# Altium PCB PCB1.PcbDoc (part 1 of 2)
Units mm, origin at the board's own origin, x right, y up, seen from the top; angles counter-clockwise.
Board outline 100 x 100 mm, 4 copper layers (Top Layer, GND, POWER, Bottom Layer), stack 1.439 mm thick; 27 components, 14 nets, 65 pads, 66 vias.
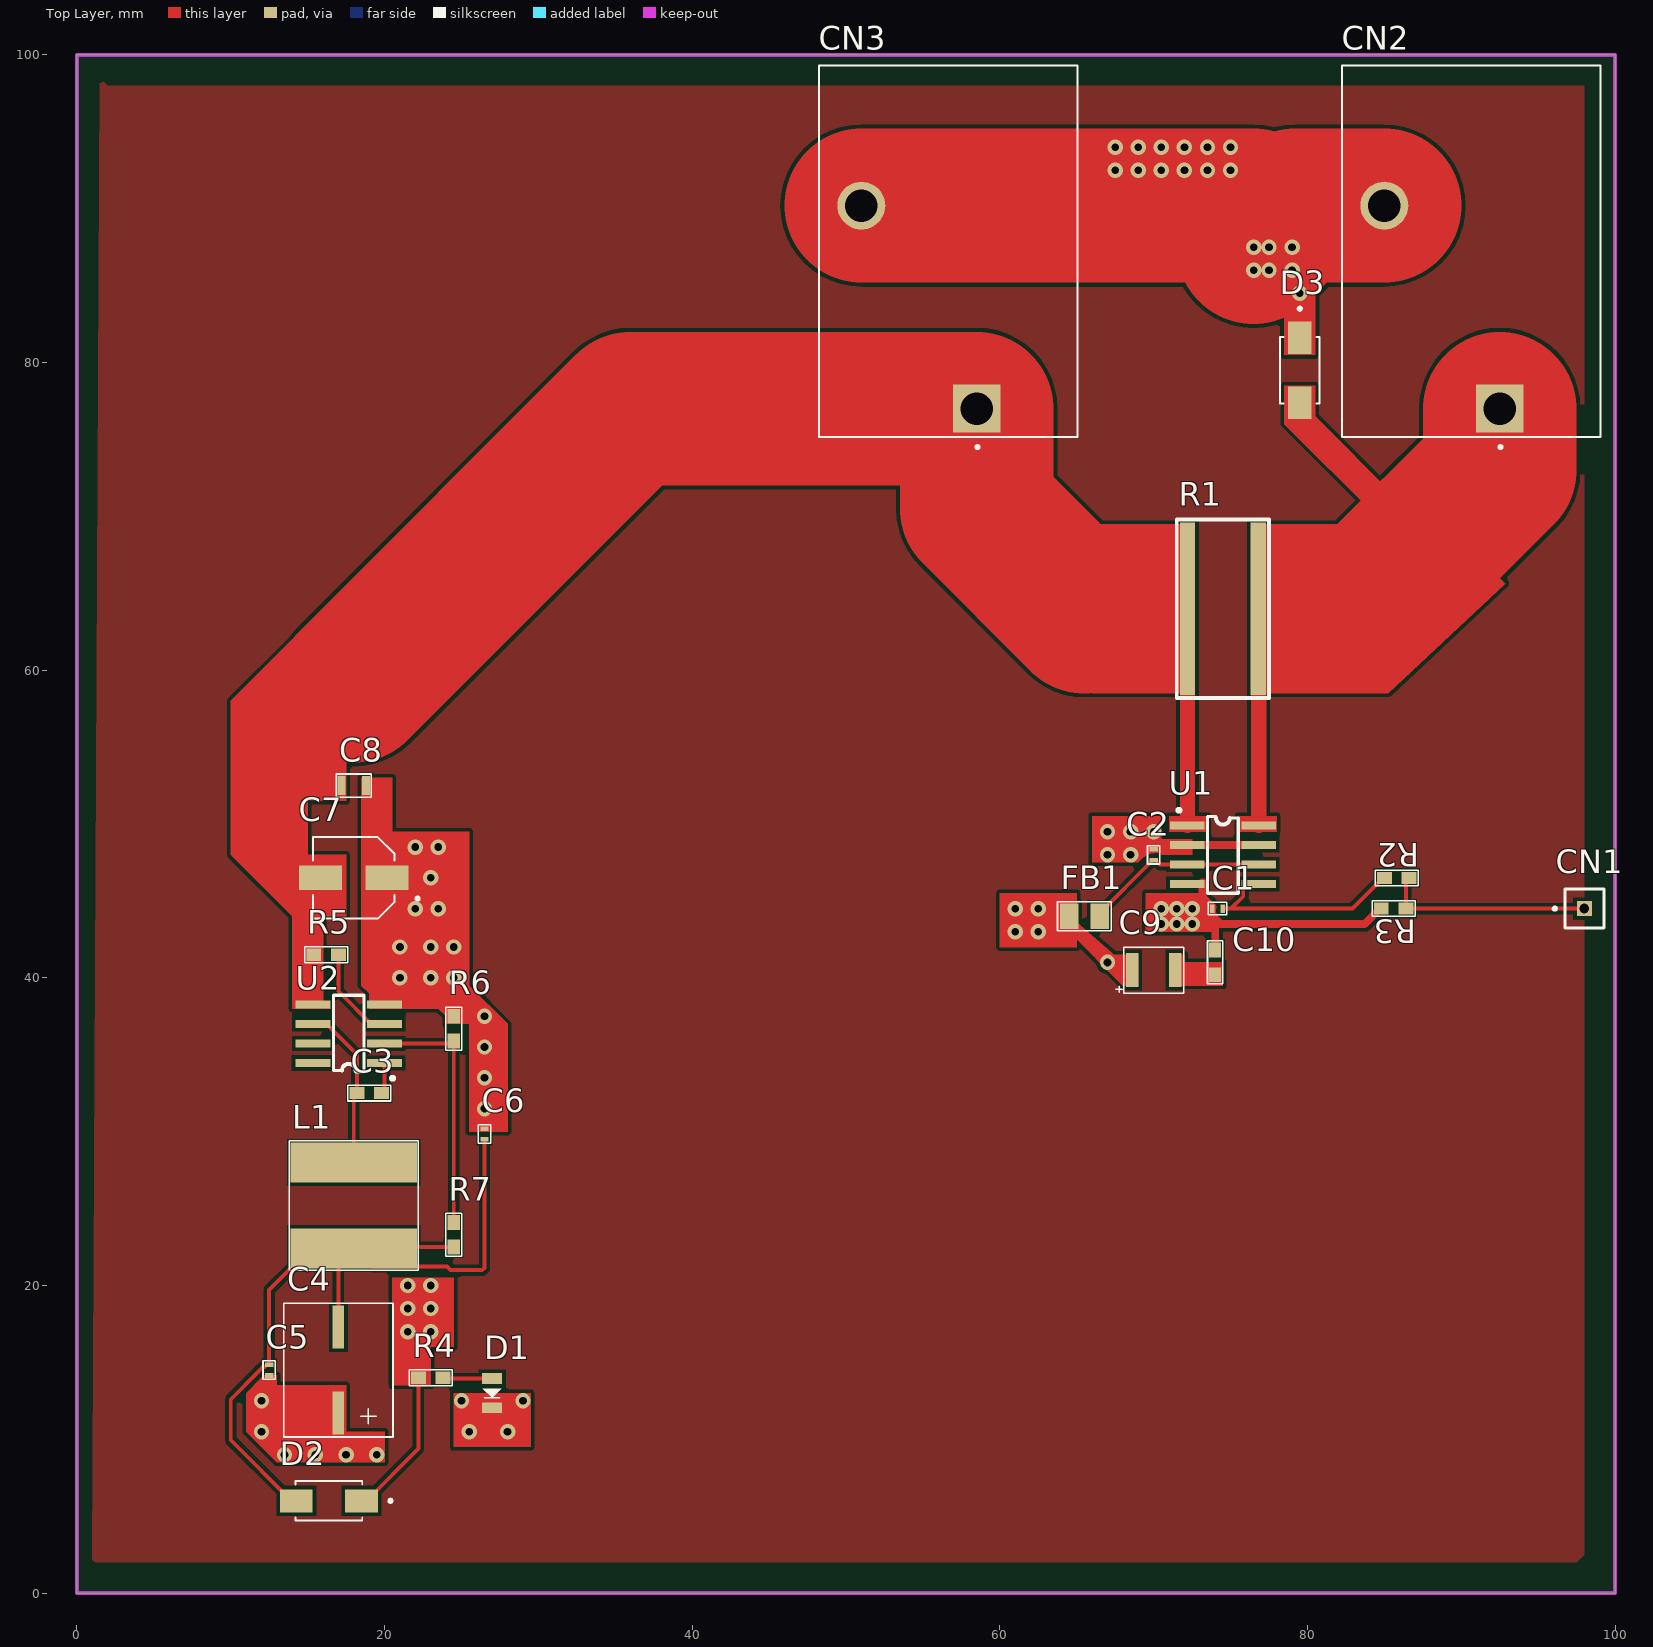
[diagram p0: Top Layer view]
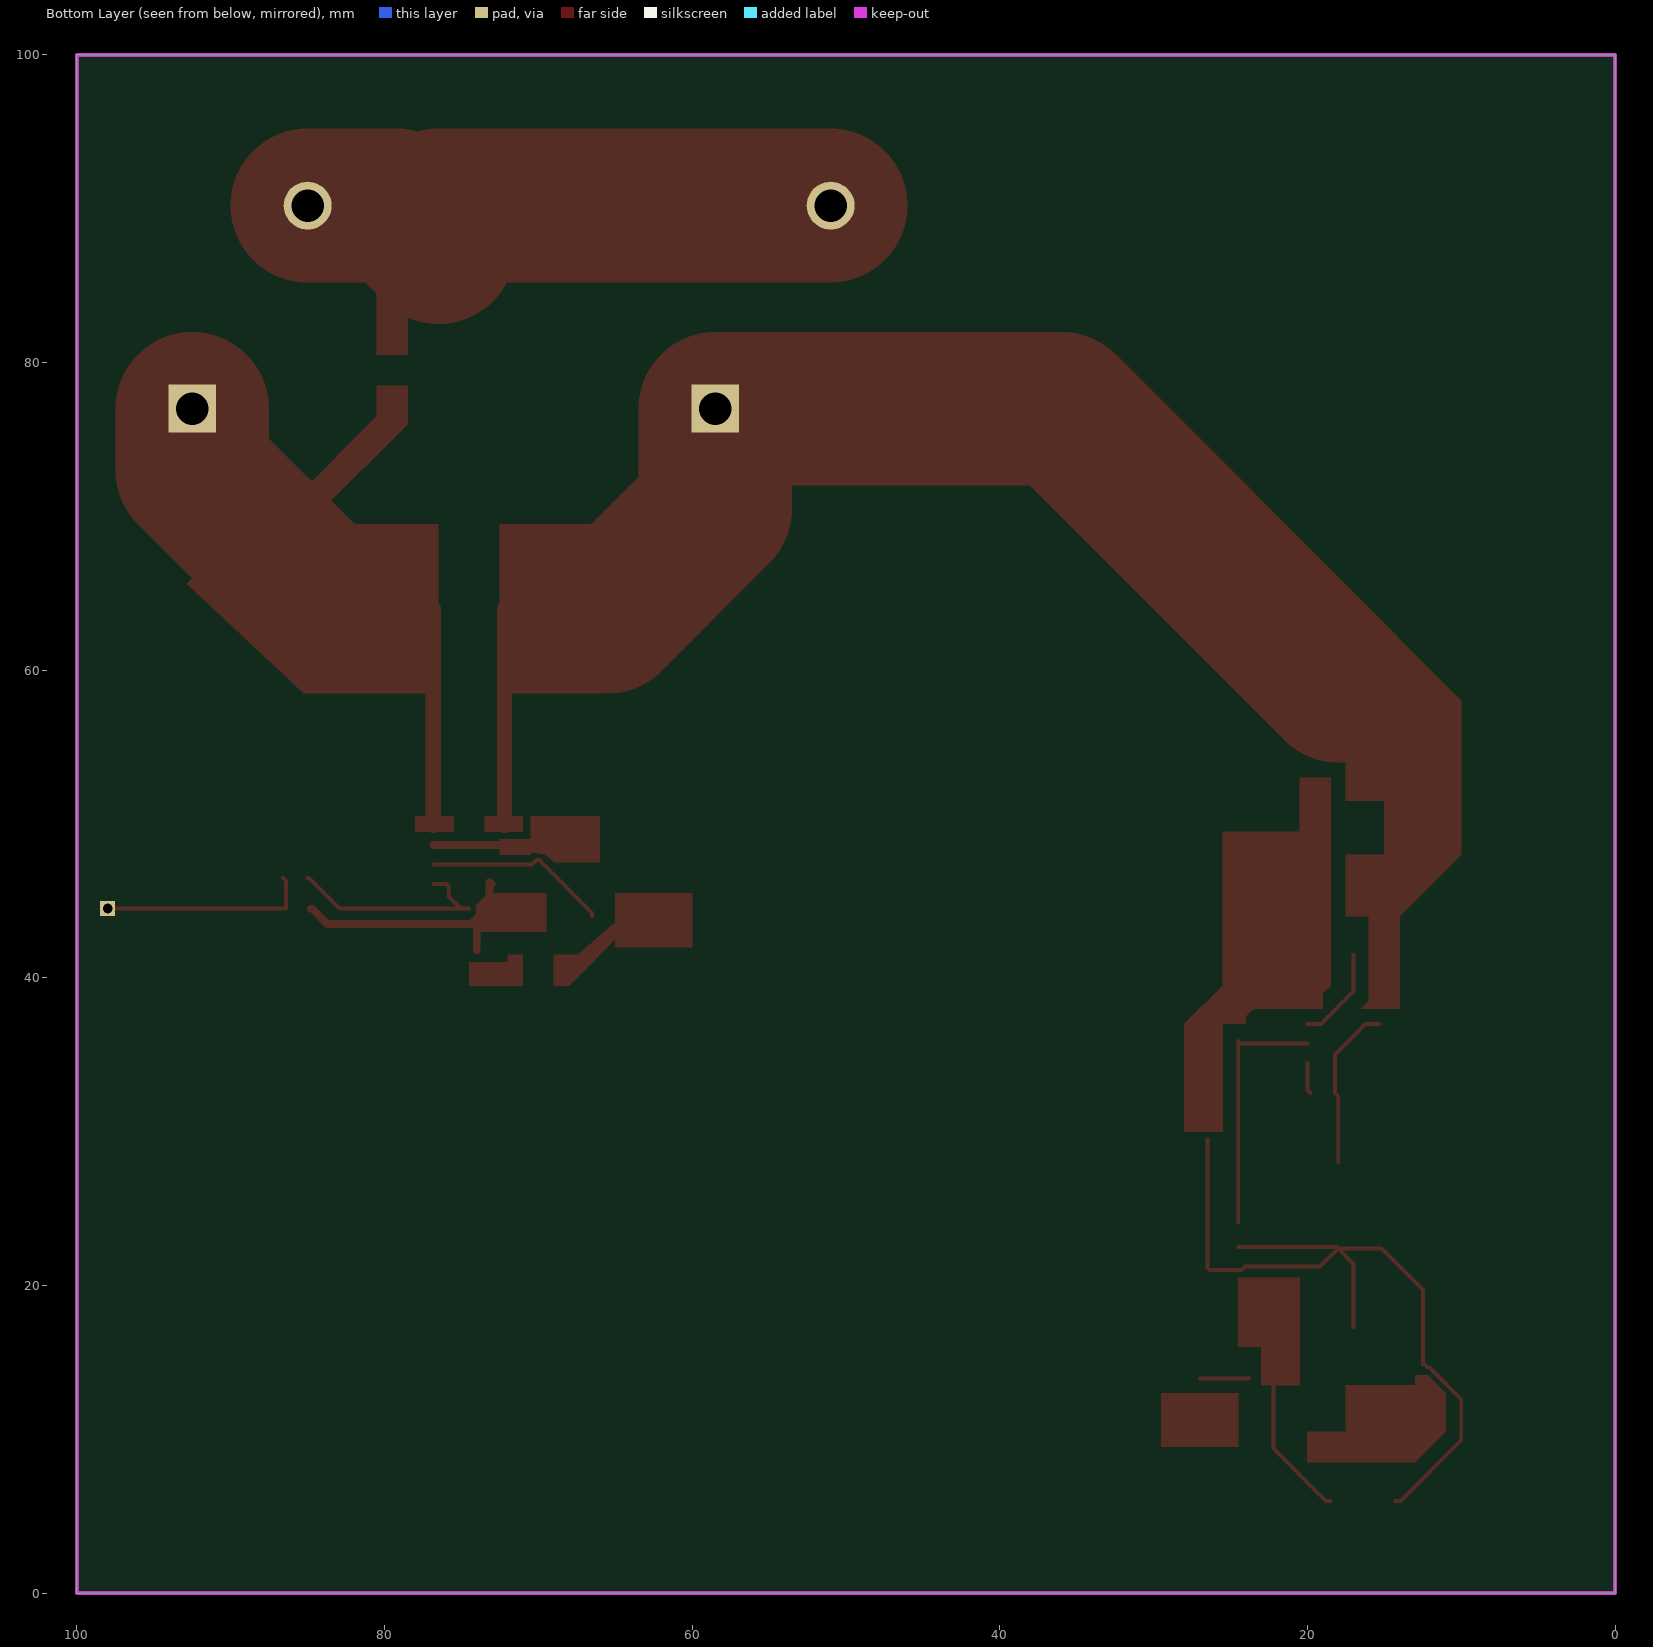
[diagram p1: Bottom Layer view, seen from below]
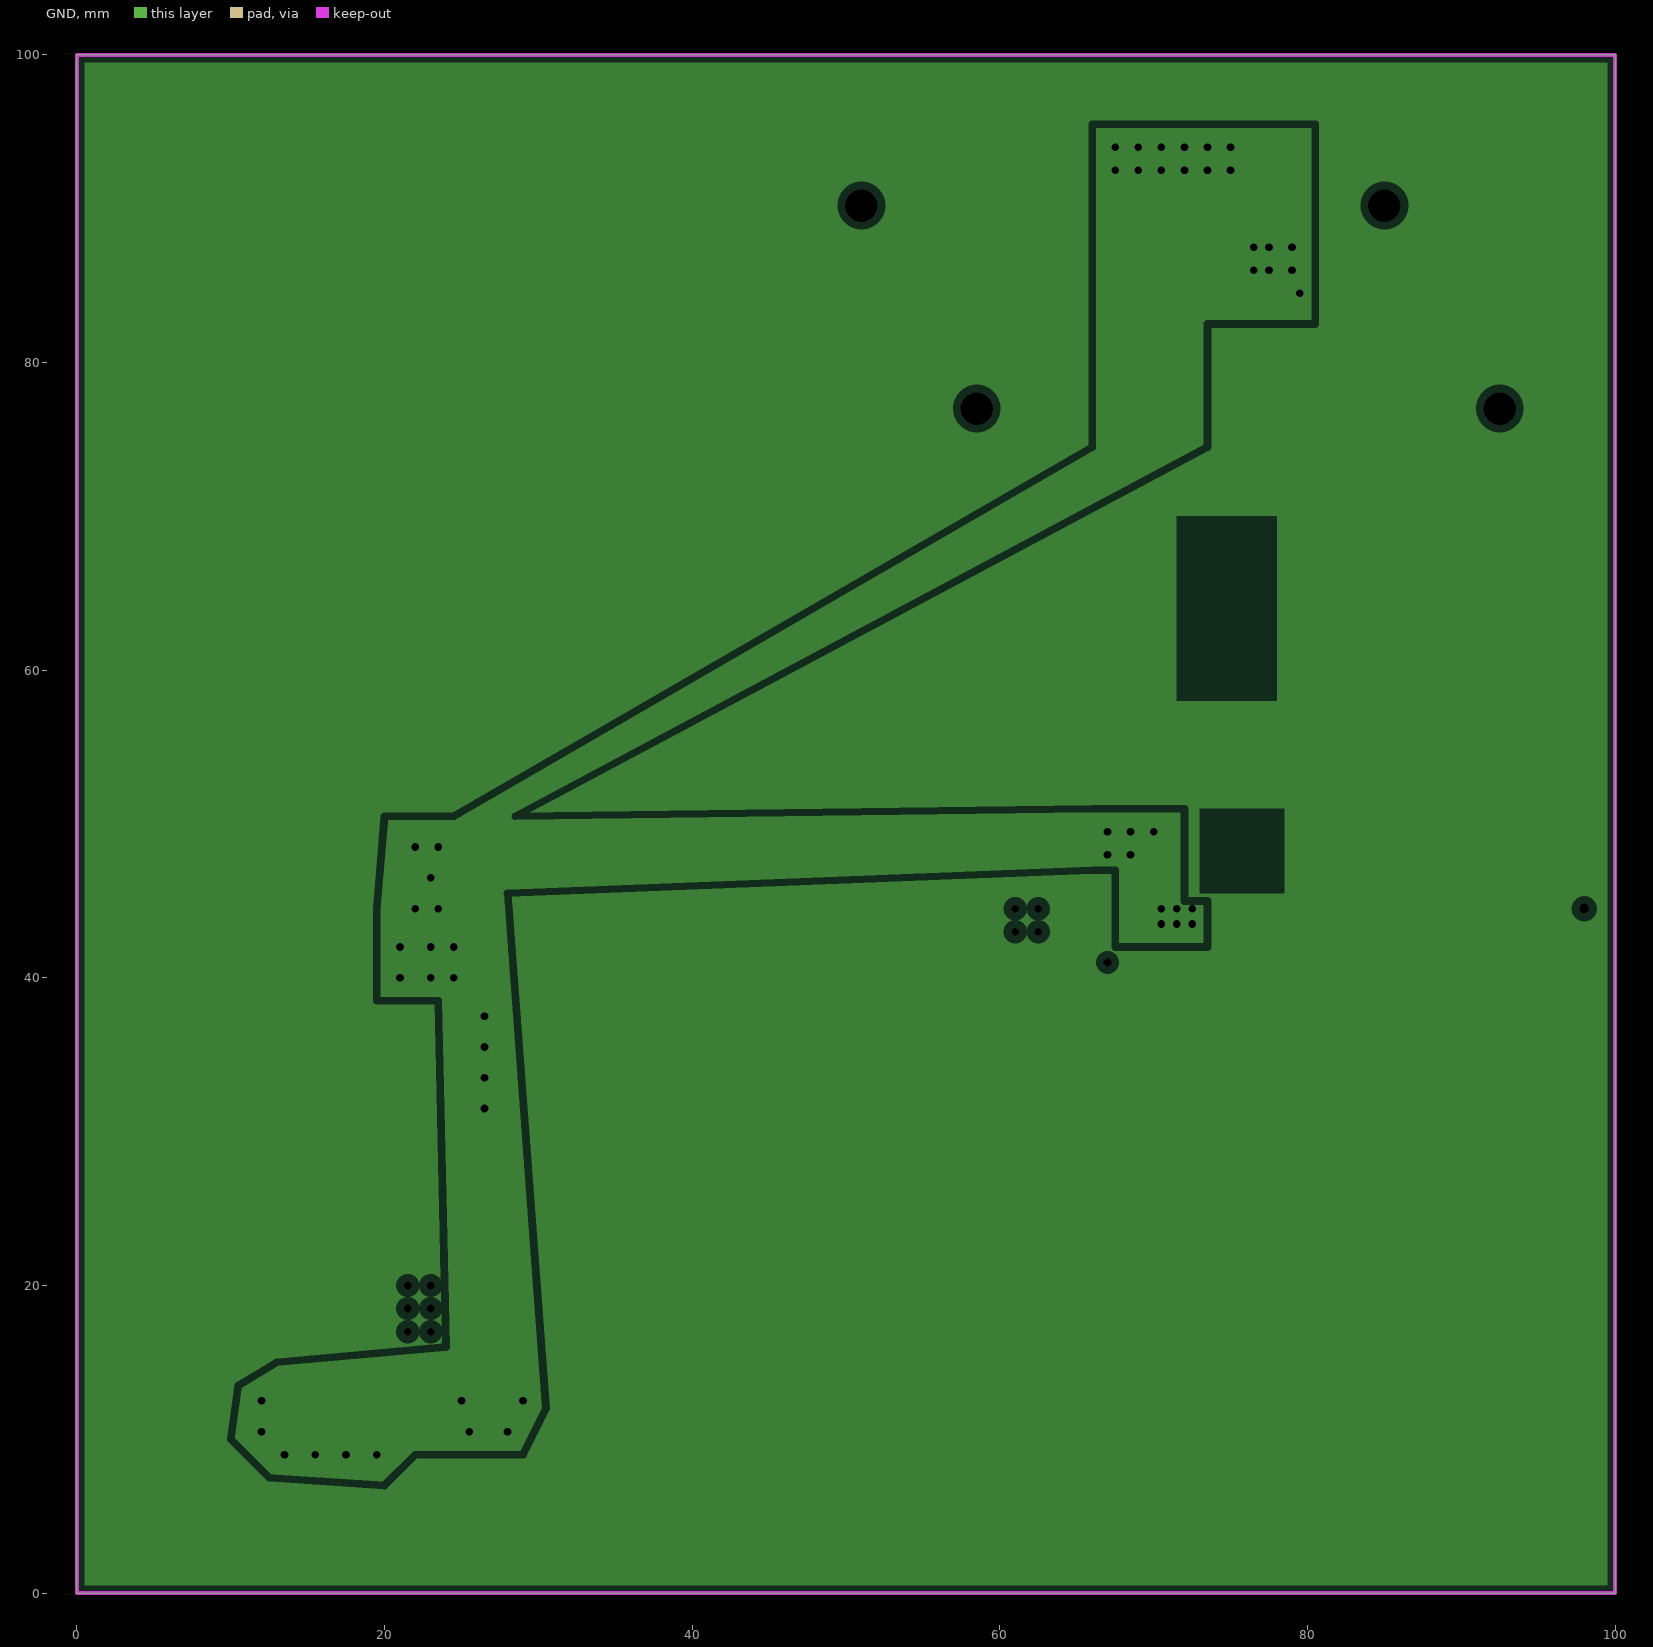
[diagram p2: GND, clearances drawn from the general rule]
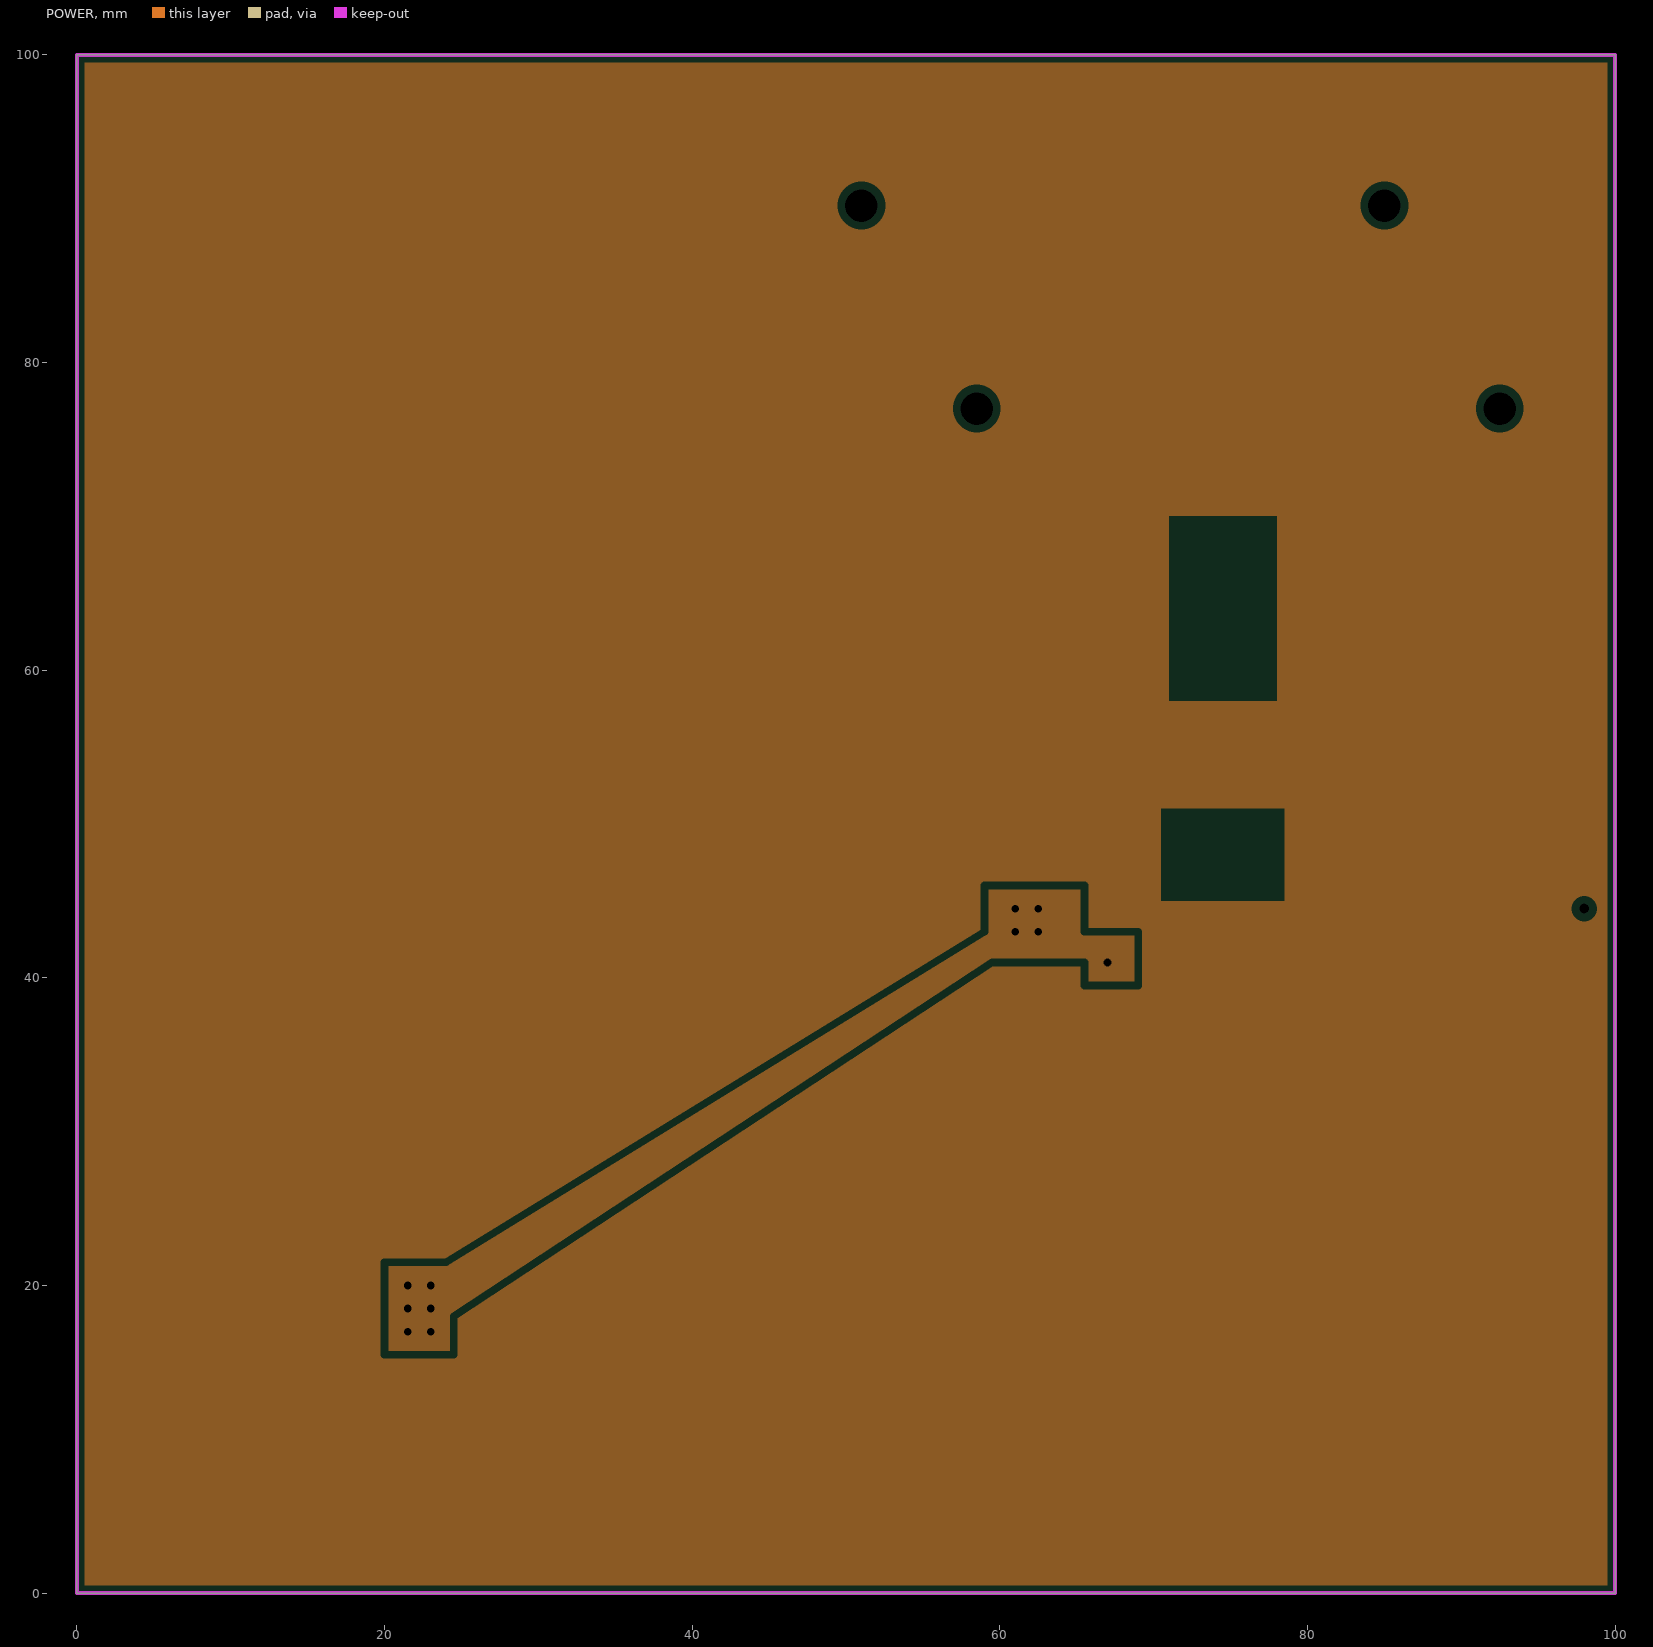
[diagram p3: POWER, clearances drawn from the general rule]
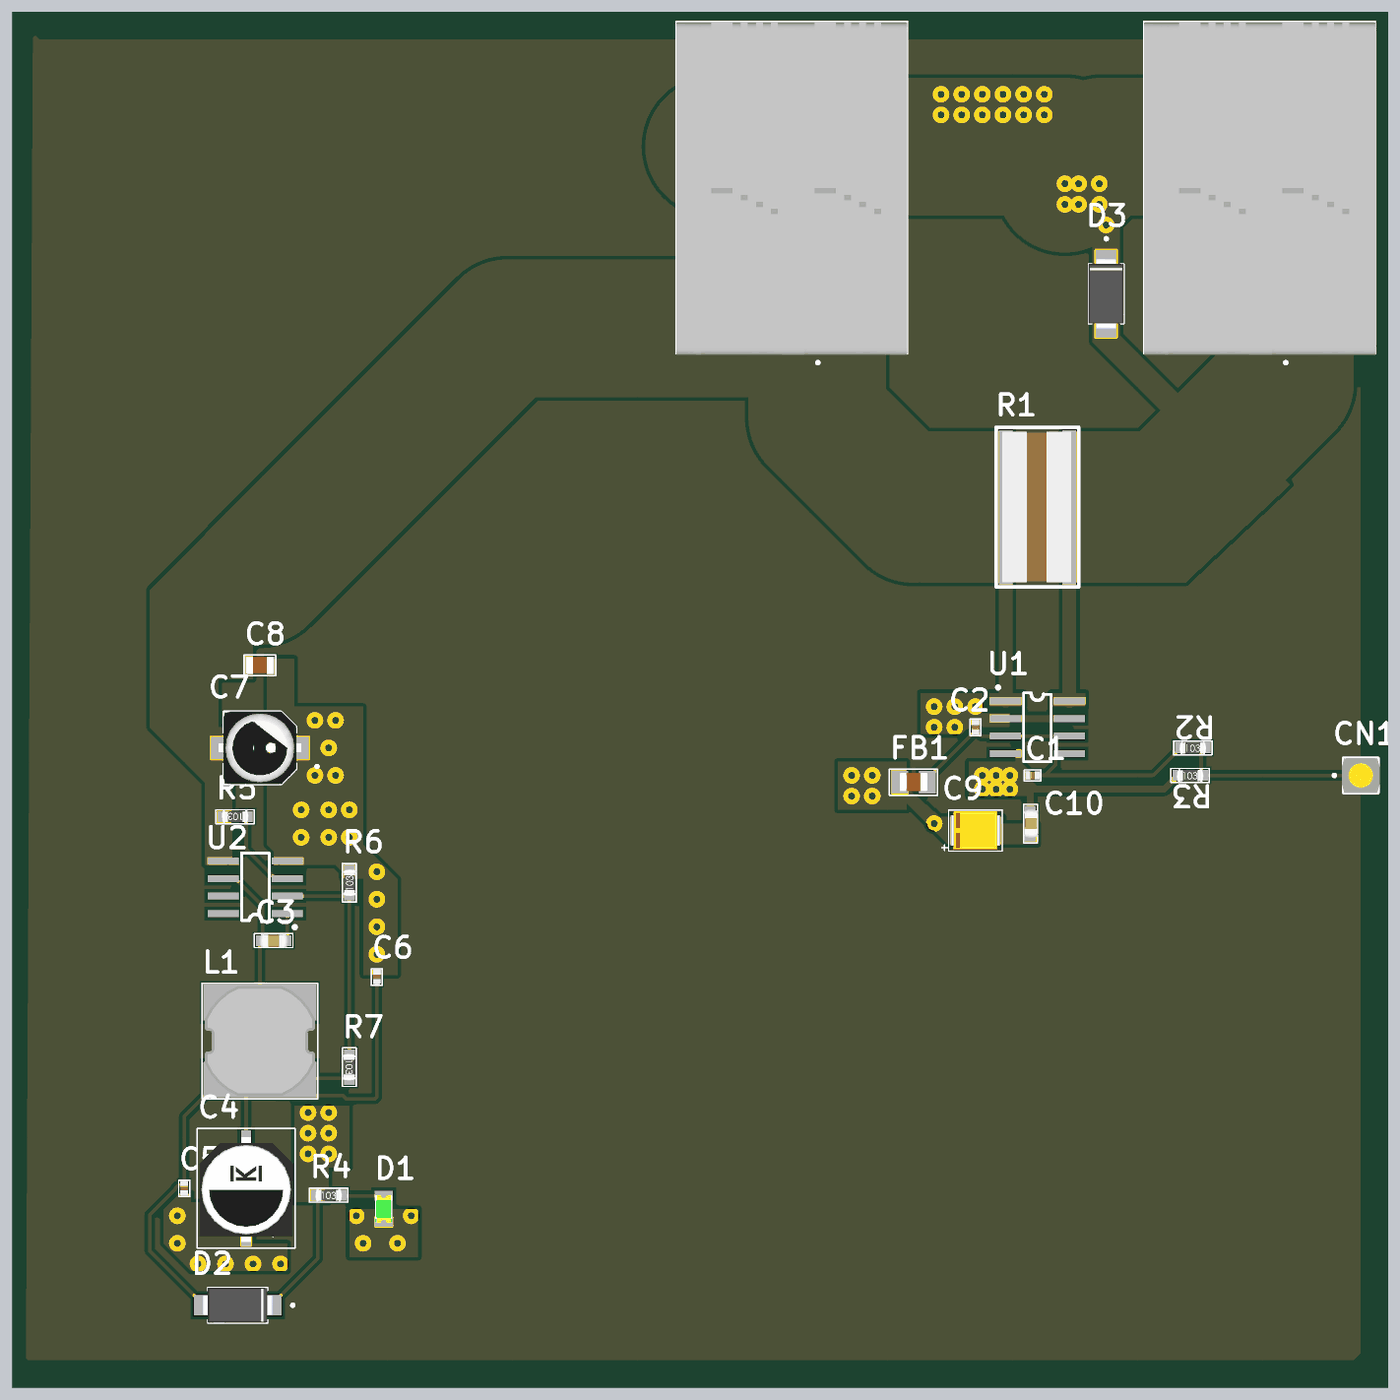
[diagram p4: 3D render of the assembled board from above, using the file's embedded part models]

## Layer stack, top to bottom
Top Solder: solder mask 0.0254, SM-001, Dk 4
Top Layer: signal copper 0.07
Dielectric 1: prepreg 0.1295, PP-017, Dk 4.3
Dielectric 2: prepreg 0.1295, PP-017, Dk 4.3
GND: plane copper 0.035
Dielectric 3: core 0.7112, Core-039, Dk 4.8
POWER: plane copper 0.035
Dielectric 4: prepreg 0.1295, PP-017, Dk 4.3
Dielectric 5: prepreg 0.1295, PP-017, Dk 4.3
Bottom Layer: signal copper 0.07
Bottom Solder: solder mask 0.0254, SM-001, Dk 4

## Board outline
0,0 100,0 100,100 0,100

## Design rules (kind name [scope] priority, off if disabled: settings)
Clearance [All] p1: gap=0.254 ignorepadtopadclearanceinfootprint=FALSE
PlaneClearance [All] p1: clearance=0.508
PlaneConnect [All] p1: planeconnectstyle=Relief reliefexpansion=0.508 reliefentries=4 reliefconductorwidth=0.254 reliefairgap=0.254
PolygonConnect [All] p1: connectstyle=Relief reliefconductorwidth=0.254 reliefentries=4 polygonreliefangle="90 Angle" airgapwidth=0.254
RoutingVias [All] p1: holewidth=0.711 width=1.27 viastyle="Through Hole" minholewidth=0.711 minwidth=1.27 maxholewidth=0.711 maxwidth=1.27
SolderMaskExpansion [All] p1: expansion=0.102 istentingtop=FALSE
SupplyNets "Schematic Supply Nets_1" [InNet('36VDC')] p1: voltage=0.000
SupplyNets "Schematic Supply Nets" [InNet('GND')] p2: voltage=0.000
Width [All] p1: maxlimit=16 minlimit=0.254 preferedwidth=0.254 minimp=50.000000 maximp=50.000000 favimp=50.000000
28 further rules are at their usual default settings.

## Classes and differential pairs
component class "Akım Algılama": C1 C2 CN1 CN2 CN3 D3 R1 R2 R3 U1
component class "5V Converter": C3 C4 C5 C6 C7 C8 C9 C10 D1 D2 FB1 L1 R4 R5 R6 R7 U2

## Components (designator, comment, footprint, x,y, rotation, side; value= is the part's Value field where it differs from the comment)
C1 "CC0402KPX7R9BB104" CAP_1005 74.15,44.5 r0 top
C2 "CC0402KPX7R9BB104" CAP_1005 70,48 r90 top
C3 "C0603C103F3GECAUTO" CAP_0603 19,32.5 r0 top
C4 "EEV226M025S9DAA" "EEV Series" 17,14.5 r90 top
C5 "CL05B104KA5NNNC" CAP_1005 12.5,14.5 r270 top value=0.1uF
C6 "CL05B104KA5NNNC" CAP_1005 26.5,29.85 r90 top value=0.1uF
C7 "EEE-FK1H100UR" CAP_RADIAL_EEE-FK1H100UR 18,46.5 r180 top value=10uF
C8 "KGM21NR71H104KT" CAP_2012 18,52.5 r0 top value=0.1UF
C9 "T494B106K016AT" "CAP_TANTAL_1411 [3528 Metric]" 70,40.5 r0 top value=10uF
C10 "C0603C104K5RACTU" CAP_0603 74,41 r90 top
CN1 "TS-101-T-A" TS-101-T-A 98,44.5 r0 top
CN2 "1719192" 1719192 99.3,99.55 r180 top
CN3 "1719192" 1719192 65.3,99.55 r180 top
D1 "LTST-C171GKT" LED_GREEN_0805 27,13 r90 top
D2 "SS14" "SMA-2 (SS14)" 16.385,6 r180 top
D3 "SS14" "SMA-2 (SS14)" 79.5,79.5 r270 top
FB1 "BLM21PG221SN1D" CAP_0805 65.5,44 r0 top
L1 "SRN8040-101M" SRN8040-101M 18,25.2 r270 top
R1 "FCSL110R005FER" FCSL110 74.5,64 r0 top value=5mR
R2 "RC0201FR-0710KL" RES_0603 85.8,46.5 r0 top value=100kR
R3 "RC0603FR-106K8L" RES_0603 85.6,44.5 r0 top value=6.8kR
R4 "CRG0603F330R" RES_0603 23,14 r0 top value=330R
R5 "ERJ-3EKF3303V" RES_0603 16.2,41.5 r180 top value=330kR
R6 "RC0603FR-071K2L" RES_0603 24.5,36.7 r90 top value=1.2kR
R7 "RC0603FR-106K8L" RES_0603 24.5,23.3 r270 top value=6.8kR
U1 "INA240A2DR" SOIC8 74.5,48 r270 top
U2 "LM5017MR/NOPB" SOIC8 17.675,36.365 r90 top

## Footprints (in the part's own frame and the unit in brackets; to place one, negate y for a bottom-side part, rotate by r counter-clockwise, add the part's x,y. Pads: shape width x height; smd on the part's side, far side on the other; paste and mask are expansions set on the pad)
1719192 [mm]
  rect 3.116x3.116 / inner round 3.116 / far side rect 3.116x3.116 hole 2.1: 1(6.8,22.55)
  round 3.116 hole 2.1: 2(14.3,9.35)
  silkscreen extent 0.25,0.25 17.05,25.15, body extent 0.25,0.35 17.05,24.5, height 19.7
CAP_0603 [mil]
  rect 38x31 smd mask+1.97: 1(-31.5,0) 2(31.5,0)
  silkscreen extent -55,-20 55,20, body extent -41,-21 41,20, height 33
CAP_0805 [mm]
  rect 1.2x1.65 smd mask+0.05: 1(-1,0) 2(1,0)
  silkscreen extent -1.75,-0.95 1.75,0.95, body extent -1,-0.65 1,0.7, height 1.28
CAP_1005 [mm]
  rect 0.3x0.55 smd mask+0.05: 1(-0.35,0) 2(0.35,0)
  silkscreen extent -0.6,-0.4 0.6,0.4, body extent -0.52,-0.28 0.52,0.28, height 0.56
CAP_2012 [mm]
  rect 0.5x1.25 smd mask+0.05: 1(-0.8,0) 2(0.8,0)
  silkscreen extent -1.15,-0.75 1.15,0.75, body extent -1,-0.63 1.01,0.63, height 1
CAP_RADIAL_EEE-FK1H100UR [mm]
  rect 2.8x1.6 smd: 1(-2.15,0) 2(2.15,0)
  silkscreen extent -4.25,-2.65 2.65,2.65, body extent -3,-2.65 3,2.65, height 5.8
"CAP_TANTAL_1411 [3528 Metric]" [mm]
  rect 0.8x2.2 smd mask+0.05: 1(-1.4,0) 2(1.4,0)
  silkscreen extent -2.45,-1.5 1.95,1.5, body extent -1.75,-1.4 1.75,1.4, height 2.1
"EEV Series" [mm]
  rect 2.8x0.75 smd mask+0.05: 1(-2.8,0) 2(2.8,0)
  silkscreen extent -4.35,-3.55 4.35,3.55, body extent -3.9,-3.4 3.7,3.4, height 8.06
FCSL110 [mm]
  rect 1x11.2 smd mask+0.05: 0(-2.3,0) 1(2.3,0)
  silkscreen extent -3,-5.8 3,5.8, body extent -2.56,-5.46 2.46,5.46, height 0.51
LED_GREEN_0805 [mm]
  rect 0.7x1.3 smd mask+0.05: 1(-0.95,0) 2(0.95,0)
  silkscreen extent -0.3,-0.6 0.3,0.6, body extent -1.01,-0.62 1.01,0.62, height 1.1
RES_0603 [mil]
  rect 38x31 smd mask+1.97: 1(-31.5,0) 2(31.5,0)
  silkscreen extent -55,-20 55,20, body extent -39,-20 39,19, height 19
"SMA-2 (SS14)" [mm]
  rect 2.12x1.5 smd: 1(-2.115,0) 2(2.115,0)
  silkscreen extent -4.1,-1.28 2.16,1.28, body extent -2.57,-1.28 2.57,1.28, height 2.5
SOIC8 [mm]
  rect 0.5x2.25 smd mask+0.05: 1(-1.905,-2.325) 2(-0.635,-2.325) 3(0.635,-2.325) 4(1.905,-2.325) 5(1.905,2.325) 6(0.635,2.325) 7(-0.635,2.325) 8(-1.905,2.325)
  silkscreen extent -2.99,-2.96 2.5,1, body extent -2.45,-3 2.45,3, height 1.7
SRN8040-101M [mm]
  rect 2.6x8.2 smd mask+0.05: 1(-2.8,0) 2(2.8,0)
  silkscreen extent -4.2,-4.2 4.2,4.2, body extent -4,-4 4,4, height 4
TS-101-T-A [mm]
  rect 0.985x0.985 / inner round 0.985 / far side rect 0.985x0.985 hole 0.635: 1(0,0)
  silkscreen extent -2.02,-1.27 1.27,1.27, body extent -1.37,-1.27 1.37,1.27, height 8.33

## Part data
C1 C2: "CAP 0402 50V 100 NF X7R", Manufacturer=Yageo, Supplier Part Number=4254870, Category="Ceramic Capacitors", Designed by="ismet Akalın", Manufacturer Part Number=CC0402KPX7R9BB104, Pricing="10=0,0234, 500=0,0229, 2500=0,0187, 10000=0,0155, 25000=0,0144, 50000=0,0122 (EUR)", RoHS=Yes, Stock=13930, Supplier=Farnell
C3: "CAP CER 10000PF 25V C0G/NP0 0603", Capacitor Type=Ceramic, Manufacturer=KEMET, Supplier Part Number=80-C0603C103F3GEAUTO, Category="Ceramic Capacitors", ComponentLink1Description=https://datasheet.ciiva.com:443/pdfs/VipMasterIC/IC/KEME/KEME-S-A0008958440/KEME-S-A0008958440-1.pdf?src-supplier=IHS+Markit, ComponentLink1URL=https://datasheet.ciiva.com:443/pdfs/VipMasterIC/IC/KEME/KEME-S-A0008958440/KEME-S-A0008958440-1.pdf?src-supplier=IHS+Markit, ComponentLink2Description=https://datasheet.octopart.com/C0603C103F3GECAUTO-KEMET-datasheet-149521794.pdf?src-supplier=Farnell, ComponentLink2URL=https://datasheet.octopart.com/C0603C103F3GECAUTO-KEMET-datasheet-149521794.pdf?src-supplier=Farnell, Designed by="ismet Akalın", Dielectric Material=Ceramic, JESD-609 Code=e3, Manufacturer Part Number=C0603C103F3GECAUTO, Pins=2, Pricing="1=0,8, 10=0,507, 50=0,455, 100=0,354, 1000=0,315, 10000=0,314 (USD)", Reach SVHC Compliant=Yes, RoHS=Yes, RoHS Compliant=Yes, Stock=27687, Supplier=Mouser, Terminal Finish=Nickel
C4: "CAP ALUM 22UF 20% 25V SMD", Capacitor Type=Aluminium, Manufacturer=KEMET, Supplier Part Number=80-EEV226M025S9DAA, Category="Aluminum Electrolytic Capacitors", ComponentLink1Description=https://datasheet.ciiva.com:443/pdfs/VipMasterIC/IC/KEME/KEME-S-A0008611149/KEME-S-A0008611149-1.pdf?src-supplier=IHS+Markit, ComponentLink1URL=https://datasheet.ciiva.com:443/pdfs/VipMasterIC/IC/KEME/KEME-S-A0008611149/KEME-S-A0008611149-1.pdf?src-supplier=IHS+Markit, ComponentLink2Description=https://api.kemet.com/component-edge/download/datasheet/EEV226M025S9DAA.pdf?src-supplier=Digikey, ComponentLink2URL=https://api.kemet.com/component-edge/download/datasheet/EEV226M025S9DAA.pdf?src-supplier=Digikey, Designed by="ismet Akalın", Manufacturer Part Number=EEV226M025S9DAA, Pins=2, Pricing="1=0,32, 10=0,146, 50=0,146, 100=0,103, 1000=0,094, 10000=0,074 (USD)", Reach SVHC Compliant=Yes, RoHS=Yes, RoHS Compliant=Yes, Stock=25705, Supplier=Mouser
C5 C6: "CAP CER 0.1UF 25V X7R 0402", Capacitor Type=Ceramic, Case/Package=0402, Manufacturer=Samsung, Max Operating Temperature=125°C, Min Operating Temperature=-55°C, Package Shape=Rectangular, Rated DC Voltage (URdc)=25V, Supplier Part Number=187-CL05B104KA5NNNC, Temperature Characteristics Code=X7R, Tolerance  (fill in as +-)=10%, Category="Ceramic Capacitors", ComponentLink1Description=https://datasheet.ciiva.com:443/pdfs/VipMasterIC/IC/SEMS/SEMS-S-A0008525088/SEMS-S-A0008525148-1.pdf?src-supplier=IHS+Markit, ComponentLink1URL=https://datasheet.ciiva.com:443/pdfs/VipMasterIC/IC/SEMS/SEMS-S-A0008525088/SEMS-S-A0008525148-1.pdf?src-supplier=IHS+Markit, ComponentLink2Description=http://www.samsungsem.com/kr/support/product-search/mlcc/CL05B104KA5NNNC.jsp?src-supplier=Digikey, ComponentLink2URL=http://www.samsungsem.com/kr/support/product-search/mlcc/CL05B104KA5NNNC.jsp?src-supplier=Digikey, ComponentLink3Description=https://datasheet.octopart.com/CL05B104KA5NNNC-Samsung-Electro-Mechanics-datasheet-116890910.pdf?src-supplier=Future+Electronics, ComponentLink3URL=https://datasheet.octopart.com/CL05B104KA5NNNC-Samsung-Electro-Mechanics-datasheet-116890910.pdf?src-supplier=Future+Electronics, Designed by="ismet Akalın", Dielectric Material=Ceramic, JESD-609 Code=e3, Manufacturer Part Number=CL05B104KA5NNNC, Mounting Technology="Surface Mount", Multilayer=Yes, Packaging="Tape and Reel", Pins=2, Pricing="1=0,1, 10=0,008, 50=0,008, 100=0,007, 1000=0,004, 10000=0,002 (USD)", Reach SVHC Compliant=Yes, RoHS=Yes, RoHS Compliant=Yes, Stock=308112, Supplier=Mouser, Terminal Finish=Nickel, Termination=Wraparound, Tolerance (fill in as +-)=10%
C7: "CAP ALUM 10UF 20% 50V SMD", Capacitor Type=Aluminium, Case/Package=2121, Leakage Current=5uA, Manufacturer=Panasonic, Max Operating Temperature=105°C, Min Operating Temperature=-55°C, Package Style=SMTMeter, Rated DC Voltage (URdc)=50V, Ripple Current=63.75mA, Supplier Part Number=667-EEE-FK1H100UR, Tolerance  (fill in as +-)=20%, Category="Aluminum Electrolytic Capacitors", ComponentLink1Description=https://datasheet.ciiva.com:443/pdfs/VipMasterIC/IC/PANA/PANA-S-A0009782343/PANA-S-A0009782343-1.pdf?src-supplier=IHS+Markit, ComponentLink1URL=https://datasheet.ciiva.com:443/pdfs/VipMasterIC/IC/PANA/PANA-S-A0009782343/PANA-S-A0009782343-1.pdf?src-supplier=IHS+Markit, ComponentLink2Description=https://datasheet.ciiva.com/11777/0900766b80e4e8b0-11777247.pdf?src-supplier=Rs, ComponentLink2URL=https://datasheet.ciiva.com/11777/0900766b80e4e8b0-11777247.pdf?src-supplier=Rs, ComponentLink3Description=https://datasheet.ciiva.com/29313/443489-da-01-en-smd-elko-vfk-c-10-uf-50v-29313597.pdf?src-supplier=Conrad, ComponentLink3URL=https://datasheet.ciiva.com/29313/443489-da-01-en-smd-elko-vfk-c-10-uf-50v-29313597.pdf?src-supplier=Conrad, ComponentLink4Description=https://datasheet.ciiva.com/48524/fk-eng-tds-48524072.pdf?src-supplier=Distrelec, ComponentLink4URL=https://datasheet.ciiva.com/48524/fk-eng-tds-48524072.pdf?src-supplier=Distrelec, ComponentLink5Description=https://datasheet.ciiva.com/43463/58258-43463526.pdf?src-supplier=Farnell, ComponentLink5URL=https://datasheet.ciiva.com/43463/58258-43463526.pdf?src-supplier=Farnell, ComponentLink6Description=https://datasheet.ciiva.com/46385/58258-46385983.pdf?src-supplier=Element14, ComponentLink6URL=https://datasheet.ciiva.com/46385/58258-46385983.pdf?src-supplier=Element14, ComponentLink7Description=https://datasheet.ciiva.com/14594/70258115-14594166.pdf?src-supplier=Allied+Electronics, ComponentLink7URL=https://datasheet.ciiva.com/14594/70258115-14594166.pdf?src-supplier=Allied+Electronics, ComponentLink8Description=https://datasheet.ciiva.com/46385/1676921-46385982.pdf?src-supplier=Element14, ComponentLink8URL=https://datasheet.ciiva.com/46385/1676921-46385982.pdf?src-supplier=Element14, Designed by="ismet Akalın", Dielectric Material=Aluminium, Height=5.8mm, Length=6.5mm, Manufacturer Part Number=EEE-FK1H100UR, Mounting Technology="Surface Mount", Packaging="Tape and Reel", Pins=2, Polarity=Polarized, Pricing="1=0,36, 10=0,197, 50=0,197, 100=0,166, 1000=0,105, 10000=0,092 (USD)", Reach SVHC Compliant=Yes, Reference Standard=AEC-Q200, RoHS=Yes, RoHS Compliant=Yes, Stock=33696, Supplier=Mouser, Tan Delta=0.1, Termination=Flat, Tolerance (fill in as +-)=20%, Width=5.3mm
C8: "CAP CER 0.1UF 50V X7R 0805", Capacitor Type=Ceramic, Case/Package=0805, Manufacturer="Kyocera AVX", Manufacturer Part Number=08055C104KAT2A, Max Operating Temperature=125°C, Min Operating Temperature=-55°C, Package Shape=Rectangular, Package Style=SMTMeter, Rated DC Voltage (URdc)=50V, Supplier Part Number=581-08055C104K, Temperature Characteristics Code=X7R, Tolerance  (fill in as +-)=10%, Category="Ceramic Capacitors", ComponentLink1Description=https://datasheet.ciiva.com:443/pdfs/VipMasterIC/IC/AVXC/AVXC-S-A0009640452/AVXC-S-A0009640452-1.pdf?src-supplier=IHS+Markit, ComponentLink1URL=https://datasheet.ciiva.com:443/pdfs/VipMasterIC/IC/AVXC/AVXC-S-A0009640452/AVXC-S-A0009640452-1.pdf?src-supplier=IHS+Markit, ComponentLink2Description=https://datasheet.ciiva.com/11786/0900766b802d4698-11786116.pdf?src-supplier=Rs, ComponentLink2URL=https://datasheet.ciiva.com/11786/0900766b802d4698-11786116.pdf?src-supplier=Rs, ComponentLink3Description=https://datasheet.ciiva.com/16199/cx7r-16199014.pdf?src-supplier=Future+Electronics, ComponentLink3URL=https://datasheet.ciiva.com/16199/cx7r-16199014.pdf?src-supplier=Future+Electronics, ComponentLink4Description=https://datasheet.ciiva.com/150/cx7r-150259.pdf?src-supplier=Digikey, ComponentLink4URL=https://datasheet.ciiva.com/150/cx7r-150259.pdf?src-supplier=Digikey, ComponentLink5Description=https://datasheet.ciiva.com/7812/cx7r-7812079.pdf?src-supplier=Element14, ComponentLink5URL=https://datasheet.ciiva.com/7812/cx7r-7812079.pdf?src-supplier=Element14, ComponentLink6Description=https://datasheet.ciiva.com/2988/cx7r-2988014.pdf?src-supplier=Avnet, ComponentLink6URL=https://datasheet.ciiva.com/2988/cx7r-2988014.pdf?src-supplier=Avnet, Designed by="ismet Akalın", Dielectric Material=Ceramic, Height=0.94mm, JESD-609 Code=e3, Length=2.01mm, Mounting Technology="Surface Mount", Multilayer=Yes, Packaging="Tape and Reel", Pins=2, Pricing="1=0,1, 10=0,053, 50=0,053, 100=0,032, 1000=0,029, 10000=0,024 (USD)", Reach SVHC Compliant=Yes, RoHS=Yes, RoHS Compliant=Yes, Stock=1054406, Supplier=Mouser, Terminal Finish=Nickel, Termination=Wraparound, Tolerance (fill in as +-)=10%, Width=1.25mm
C9: "TANTAL CAP 10UF 10% 16V SMD 1411 [3528 Metric] Polarized", Capacitor Type=Tantalum, Case/Package=1411, ESR (Equivalent Series Resistance)=800mR, Leakage Current=1.6uA, Manufacturer=KEMET, Max Operating Temperature=125°C, Min Operating Temperature=-55°C, Package Shape=Rectangular, Package Style=SMTMeter, Rated DC Voltage (URdc)=16V, Ripple Current=130.4mA, Supplier Part Number=1692399, Tolerance  (fill in as +-)=10%, Category="Tantalum Capacitors", ComponentLink1Description=https://datasheet.ciiva.com:443/pdfs/VipMasterIC/IC/KEME/KEME-S-A0009782346/KEME-S-A0009782346-1.pdf?src-supplier=IHS+Markit, ComponentLink1URL=https://datasheet.ciiva.com:443/pdfs/VipMasterIC/IC/KEME/KEME-S-A0009782346/KEME-S-A0009782346-1.pdf?src-supplier=IHS+Markit, ComponentLink2Description=https://datasheet.ciiva.com/27747/1574858-27747690.pdf?src-supplier=Jameco, ComponentLink2URL=https://datasheet.ciiva.com/27747/1574858-27747690.pdf?src-supplier=Jameco, ComponentLink3Description=https://datasheet.ciiva.com/7696/1684480-7696458.pdf?src-supplier=Element14, ComponentLink3URL=https://datasheet.ciiva.com/7696/1684480-7696458.pdf?src-supplier=Element14, ComponentLink4Description=https://datasheet.ciiva.com/258/kem-t2008-t494-258909.pdf?src-supplier=Digikey, ComponentLink4URL=https://datasheet.ciiva.com/258/kem-t2008-t494-258909.pdf?src-supplier=Digikey, ComponentLink5Description=https://datasheet.ciiva.com/258/kem-t2008-t494-258910.pdf?src-supplier=Digikey, ComponentLink5URL=https://datasheet.ciiva.com/258/kem-t2008-t494-258910.pdf?src-supplier=Digikey, ComponentLink6Description=https://datasheet.ciiva.com/258/kem-t2008-t494-258911.pdf?src-supplier=Digikey, ComponentLink6URL=https://datasheet.ciiva.com/258/kem-t2008-t494-258911.pdf?src-supplier=Digikey, ComponentLink7Description=https://datasheet.ciiva.com/14588/70095890-14588342.pdf?src-supplier=Allied+Electronics, ComponentLink7URL=https://datasheet.ciiva.com/14588/70095890-14588342.pdf?src-supplier=Allied+Electronics, Designed by="ismet Akalın", Dielectric Material=Tantalum, Height=1.9mm, JESD-609 Code=e3, Length=3.5mm, Manufacturer Part Number=T494B106K016AT, Mounting Technology="Surface Mount", Packaging="Tape and Reel", Pins=2, Polarity=Polarized, Pricing="10=0,421, 50=0,384, 100=0,347, 500=0,346, 1000=0,345 (EUR)", Reach SVHC Compliant=Yes, Reference Standard=AEC-Q200, RoHS=Yes, RoHS Compliant=Yes, Stock=3665, Supplier=Farnell, Tan Delta=0.06, Terminal Finish=Nickel, Termination="J BEND", Tolerance (fill in as +-)=10%, Width=2.8mm
C10: library part "CAP CER 100nF 0603", "CAP CER 100nF %10 0603 SMD", Capacitance=100nF, Case Code (Metric)=1608, Case Code (Imperial)=0603, Dielectric=X7R, Dielectric Material=Ceramic, Manufacturer=KEMET, Max Operating Temperature=125°C, Min Operating Temperature=-55°C, Package Quantity=1, Supplier Part Number 1=399-5089-1-ND, Tolerance=10%, Voltage=50V, Case/Package=0603, Category="Ceramic Capacitors", ComponentLink1Description=https://datasheet.ciiva.com/7823/kem-c1002-x7r-smd-7823591.pdf?src-supplier=Element14, ComponentLink1URL=https://datasheet.ciiva.com/7823/kem-c1002-x7r-smd-7823591.pdf?src-supplier=Element14, ComponentLink2Description=https://datasheet.ciiva.com/14602/70095383-14602583.pdf?src-supplier=Allied+Electronics, ComponentLink2URL=https://datasheet.ciiva.com/14602/70095383-14602583.pdf?src-supplier=Allied+Electronics, ComponentLink3Description=https://datasheet.ciiva.com/5999/kem-c1002-x7r-smd-5999400.pdf?src-supplier=Farnell, ComponentLink3URL=https://datasheet.ciiva.com/5999/kem-c1002-x7r-smd-5999400.pdf?src-supplier=Farnell, ComponentLink4Description=https://datasheet.ciiva.com/7823/kem-c1002-x7r-smd-7823592.pdf?src-supplier=Element14, ComponentLink4URL=https://datasheet.ciiva.com/7823/kem-c1002-x7r-smd-7823592.pdf?src-supplier=Element14, ComponentLink5Description=https://datasheet.ciiva.com/28645/1851736-28645640.pdf?src-supplier=Element14, ComponentLink5URL=https://datasheet.ciiva.com/28645/1851736-28645640.pdf?src-supplier=Element14, ComponentLink6Description=https://datasheet.ciiva.com/14585/70095383-14585209.pdf?src-supplier=Allied+Electronics, ComponentLink6URL=https://datasheet.ciiva.com/14585/70095383-14585209.pdf?src-supplier=Allied+Electronics, Contact Plating=Tin,Matte, Depth=0.8mm, Designed by=BERK, Dissipation Factor=2.5%, Height=0.8mm, Lead Pitch=0.7mm, Length=0.063inch, Manufacturer Part Number=C0603C104K5RACTU, Mount="Surface Mount", Number of Pins=2, Packaging="Tape and Reel", Pricing 1="1=0,12000, 10=0,08500, 50=0,04620, 100=0,03770, 500=0,02696, 1000=0,02118 (USD)", Radiation Hardening=No, REACH SVHC="No SVHC", RoHS=Yes, RoHS Compliant=Yes, Series="SMD Comm X7R", Stock 1=1666186, Supplier 1=Digi-Key, Termination=SMD/SMT, Thickness=0.034inch, Voltage Rating=50V, Voltage Rating (DC)=50V, Width=0.031inch
CN1: "CONN HEADER VERT 1POS", Manufacturer=Samtec, Max Operating Temperature=105°C, Min Operating Temperature=-55°C, Supplier Part Number=200-TS101TA, Insulation Color=Black, Body Breadth=0.1inch, Body Length=0.1inch, Category=Connectors, ComponentLink1Description=https://datasheet.ciiva.com:443/pdfs/VipMasterIC/IC/SAMI/SAMI-S-A0003554998/SAMI-S-A0003554998-1.pdf?src-supplier=IHS+Markit, ComponentLink1URL=https://datasheet.ciiva.com:443/pdfs/VipMasterIC/IC/SAMI/SAMI-S-A0003554998/SAMI-S-A0003554998-1.pdf?src-supplier=IHS+Markit, ComponentLink2Description=https://datasheet.ciiva.com/410/tx-1xx-x-x-mkt1-410197.pdf?src-supplier=Digikey, ComponentLink2URL=https://datasheet.ciiva.com/410/tx-1xx-x-x-mkt1-410197.pdf?src-supplier=Digikey, Connector Type="BOARD CONNECTOR", Contact Finish - Mating="TIN OVER COPPER (100)", Contact Finish - Termination="TIN OVER COPPER (100)", Contact Gender=Male, Contact Material=Brass, Contact Pattern=RECTANGULAR, Contact Style="RND PIN-SKT", Designed by="ismet Akalın", DIN Conformance=No, Filter Feature=No, Manufacturer Part Number=TS-101-T-A, Mating Contact Pitch=0.1inch, Mating Information="MULTIPLE MATING PARTS AVAILABLE", Mixed Contacts=No, Mounting Style=STRAIGHT, Mounting Technology=Board, MIL Conformance=No, Number Of Connectors=1, Number of Contacts=34, Number Of PCB Rows=1, Number of Rows Loaded=1, Option="General Purpose", PCB Contact Pattern=RECTANGULAR, Plating Thickness=200uin, Pricing="1=0,19, 10=0,19, 50=0,15, 100=0,12, 1000=0,08, 10000=0,06 (USD)", Reach SVHC Compliant=Yes, Reference Standard=UL, Reliability=COMMERCIAL, RoHS=Yes, RoHS Compliant=Yes, Stock=1900, Supplier=Mouser, Terminal Length=0.156inch, Terminal Pitch=2.54mm, Termination=Solder, IEC Conformance=No, Insulation Material=Glass
CN2 CN3: "TERM BLK 2POS SIDE ENT 7.5MM PCB", Current Rating=41A, Manufacturer="Phoenix Contact", Supplier Part Number=651-1719192, Voltage Rating=800V, Category="Terminal Blocks", ComponentLink1Description=https://datasheet.ciiva.com:443/pdfs/VipMasterIC/IC/PCON/PCONS08451/PCONS08451-1.pdf?src-supplier=IHS+Markit, ComponentLink1URL=https://datasheet.ciiva.com:443/pdfs/VipMasterIC/IC/PCON/PCONS08451/PCONS08451-1.pdf?src-supplier=IHS+Markit, ComponentLink2Description=https://datasheet.ciiva.com/832/1719192-832388.pdf?src-supplier=Digikey, ComponentLink2URL=https://datasheet.ciiva.com/832/1719192-832388.pdf?src-supplier=Digikey, ComponentLink3Description=https://datasheet.ciiva.com/18619/1719192-18619035.pdf?src-supplier=Digikey, ComponentLink3URL=https://datasheet.ciiva.com/18619/1719192-18619035.pdf?src-supplier=Digikey, Designed by="ismet Akalın", Fastening Method="SPRING LOADED", Manufacturer Part Number=1719192, Manufacturer Series=1719192, Mounting Technology=Board, Number of Decks=1, Number of Rows=1, Number of Ways=2, Pricing="1=4,6, 10=4,49, 50=4,2, 100=3,86, 1000=3,21, 10000=3,13 (USD)", Reach SVHC Compliant=Yes, RoHS=Yes, RoHS Compliant=Yes, Safety Approval=UL, Stock=2635, Supplier=Mouser, Terminal and Terminal Block Type="BARRIER STRIP TERMINAL BLOCK", Wire Cross Section=6mm2, Wire/Cable Gauge=8AWG
D1: library part "LED GREEN 0805", "Green 0805 130 º Min 5 mcd Typical 12 mcd Water Clear Lens SMT LED", Case Code (Metric)=2012, Case Code (Imperial)=0805, Color=Green, Forward Current=30mA, Forward Voltage=2.1V, Lens Color=Colorless, Manufacturer="Vishay Lite-On", Max Operating Temperature=85°C, Min Operating Temperature=-55°C, Package Quantity=1, Power Dissipation=100mW, Reverse Voltage=5V, Supplier Part Number 1=160-1423-1-ND, Test Current=10mA, Case/Package=0805, Category=LEDs, ComponentLink1Description=https://datasheet.ciiva.com/2110/ltst-c171gkt-2110000.pdf?src-supplier=Digi-Key, ComponentLink1URL=https://datasheet.ciiva.com/2110/ltst-c171gkt-2110000.pdf?src-supplier=Digi-Key, ComponentLink2Description=https://datasheet.ciiva.com/11773/0900766b80dc0296-11773991.pdf?src-supplier=RSComponents, ComponentLink2URL=https://datasheet.ciiva.com/11773/0900766b80dc0296-11773991.pdf?src-supplier=RSComponents, ComponentLink3Description=https://datasheet.ciiva.com/12400/lite-on-ltst-c171gkt-190133-12400647.pdf?src-supplier=Mouser, ComponentLink3URL=https://datasheet.ciiva.com/12400/lite-on-ltst-c171gkt-190133-12400647.pdf?src-supplier=Mouser, ComponentLink4Description=https://datasheet.ciiva.com/2110/ltst-c171gkt-2110001.pdf?src-supplier=Digi-Key, ComponentLink4URL=https://datasheet.ciiva.com/2110/ltst-c171gkt-2110001.pdf?src-supplier=Digi-Key, ComponentLink5Description=https://datasheet.ciiva.com/2110/ltst-c171gkt-2110002.pdf?src-supplier=Digi-Key, ComponentLink5URL=https://datasheet.ciiva.com/2110/ltst-c171gkt-2110002.pdf?src-supplier=Digi-Key, ComponentLink6Description=https://datasheet.ciiva.com/16396/ltst-c171gkt-16396549.pdf?src-supplier=Future+Electronics, ComponentLink6URL=https://datasheet.ciiva.com/16396/ltst-c171gkt-16396549.pdf?src-supplier=Future+Electronics, Depth=1.25mm, Designed by=BERK, Dominant Wavelength=569nm, Height=0.8mm, Lead Free="Lead Free", Length=2mm, Lens Style=Diffused,Colorless,Rectangular,Clear, Lens Transparency=Clear, Luminous Intensity=12mcd, Manufacturer Part Number=LTST-C171GKT, Mount="Surface Mount", Number of Elements=1, Number of LEDs=1, Number of Pins=2, Packaging="Tape and Reel", Power Rating=100mW, Pricing 1="1=0,26000, 10=0,14100, 100=0,06560, 500=0,06060, 1000=0,04747 (USD)", Radiation Hardening=No, RoHS=Yes, RoHS Compliant=Yes, Series="CHIPLED 0805", Stock 1=159023, Supplier 1=Digi-Key, Viewing Angle=130°, Wavelength=585nm, Width=1.25mm, Illumination Color=Green
D2 D3: "DIODE SCHOTTKY 40V 1A DO214AC", Forward Voltage=500mV, Manufacturer="ON Semiconductor / Fairchild", Max Operating Temperature=125°C, Max Output current=1A, Max Power Dissipation=1.1W, Min Operating Temperature=-65°C, Non-rep Pk Forward Current-Max=30A, Package Body Material=Plastic, Package Shape=Rectangular, Package Style="SMALL OUTLINEMeter", Rep Pk Reverse Voltage-Max=40V, Supplier Part Number=512-SS14, Additional Feature="FREE WHEELING DIODE", Category="Schottky Diodes", ComponentLink1Description=https://datasheet.ciiva.com:443/pdfs/VipMasterIC/IC/ONSM/ONSM-S-A0007316185/ONSM-S-A0007316185-1.pdf?src-supplier=IHS+Markit, ComponentLink1URL=https://datasheet.ciiva.com:443/pdfs/VipMasterIC/IC/ONSM/ONSM-S-A0007316185/ONSM-S-A0007316185-1.pdf?src-supplier=IHS+Markit, ComponentLink2Description=http://www.onlinecomponents.com/datasheet/ss14.aspx?p=11369800&src-supplier=Onlinecomponents.com, ComponentLink2URL=http://www.onlinecomponents.com/datasheet/ss14.aspx?p=11369800&src-supplier=Onlinecomponents.com, ComponentLink3Description=http://www.produktinfo.conrad.com/datenblaetter/1200000-1299999/001265127-da-01-en-DIODE_SCHOTTKY_40V_1A_SS14_DO_214_AC_FSC.pdf?src-supplier=Conrad, ComponentLink3URL=http://www.produktinfo.conrad.com/datenblaetter/1200000-1299999/001265127-da-01-en-DIODE_SCHOTTKY_40V_1A_SS14_DO_214_AC_FSC.pdf?src-supplier=Conrad, ComponentLink4Description=https://www.verical.com/server-webapp/html/getDatasheet?partID=84776&src-supplier=Verical, ComponentLink4URL=https://www.verical.com/server-webapp/html/getDatasheet?partID=84776&src-supplier=Verical, ComponentLink5Description=https://datasheet.octopart.com/SS14.-Fairchild-Semiconductor-datasheet-3545.pdf?src-supplier=Element14, ComponentLink5URL=https://datasheet.octopart.com/SS14.-Fairchild-Semiconductor-datasheet-3545.pdf?src-supplier=Element14, Designed by="ismet Akalın", Diode Element Material=SILICON, Diode Type=RECTIFIER, JEDEC-95 Code=DO-214AC, JESD-30 Code=R-PDSO-C2, JESD-609 Code=e3, Manufacturer Part Number=SS14, Moisture Sensitivity Level=1, Number of Elements=1, Pins=2, Pricing="1=0,29, 10=0,195, 50=0,195, 100=0,117, 1000=0,088, 10000=0,063 (USD)", Qualification Status="Not Qualified", Reach SVHC Compliant=No, RoHS=Yes, RoHS Compliant=Yes, Stock=78089, Supplier=Mouser, Surface Mount=Yes, Technology=SCHOTTKY, Terminal Finish=Tin, Terminal Form="C BEND", Terminal Position=DUAL
FB1: "FERRITE BEAD 220 OHM 0805 1LN", Case Code=0805, Clock Frequency=100MHz, Current Rating=2A, DC Resistance-Max=50mR, Manufacturer=Murata, Max Operating Temperature=125°C, Min Operating Temperature=-55°C, Supplier Part Number=1515661, Category="Ferrite Beads and Chips", Channels=1, ComponentLink1Description=https://datasheet.ciiva.com:443/pdfs/VipMasterIC/IC/MURE/MURE-S-A0008513560/MURE-S-A0008513560-1.pdf?src-supplier=IHS+Markit, ComponentLink1URL=https://datasheet.ciiva.com:443/pdfs/VipMasterIC/IC/MURE/MURE-S-A0008513560/MURE-S-A0008513560-1.pdf?src-supplier=IHS+Markit, ComponentLink2Description=https://datasheet.ciiva.com/30514/1845321-30514028.pdf?src-supplier=Jameco, ComponentLink2URL=https://datasheet.ciiva.com/30514/1845321-30514028.pdf?src-supplier=Jameco, ComponentLink3Description=https://datasheet.ciiva.com/1012/l0110s0100blm21p-1012288.pdf?src-supplier=Digikey, ComponentLink3URL=https://datasheet.ciiva.com/1012/l0110s0100blm21p-1012288.pdf?src-supplier=Digikey, ComponentLink4Description=https://datasheet.ciiva.com/11799/0900766b81275e31-11799232.pdf?src-supplier=Rs, ComponentLink4URL=https://datasheet.ciiva.com/11799/0900766b81275e31-11799232.pdf?src-supplier=Rs, ComponentLink5Description=https://datasheet.ciiva.com/29348/442529-da-01-en-chip-drossel-0805-220r-2000ma-2-0x1-25mm-29348007.pdf?src-supplier=Conrad, ComponentLink5URL=https://datasheet.ciiva.com/29348/442529-da-01-en-chip-drossel-0805-220r-2000ma-2-0x1-25mm-29348007.pdf?src-supplier=Conrad, ComponentLink6Description=https://datasheet.ciiva.com/1012/l0110s0100blm21p-1012287.pdf?src-supplier=Digikey, ComponentLink6URL=https://datasheet.ciiva.com/1012/l0110s0100blm21p-1012287.pdf?src-supplier=Digikey, ComponentLink7Description=https://datasheet.ciiva.com/1012/l0110s0100blm21p-1012289.pdf?src-supplier=Digikey, ComponentLink7URL=https://datasheet.ciiva.com/1012/l0110s0100blm21p-1012289.pdf?src-supplier=Digikey, ComponentLink8Description=https://datasheet.ciiva.com/3081/l0110s0100blm21p-3081655.pdf?src-supplier=Avnet, ComponentLink8URL=https://datasheet.ciiva.com/3081/l0110s0100blm21p-3081655.pdf?src-supplier=Avnet, ComponentLink9Description=https://datasheet.ciiva.com/16215/l0110s0100blm21p-16215194.pdf?src-supplier=Future+Electronics, ComponentLink9URL=https://datasheet.ciiva.com/16215/l0110s0100blm21p-16215194.pdf?src-supplier=Future+Electronics, ComponentLink10Description=https://datasheet.ciiva.com/8021/1756152-8021596.pdf?src-supplier=Element14, ComponentLink10URL=https://datasheet.ciiva.com/8021/1756152-8021596.pdf?src-supplier=Element14, ComponentLink11Description=https://datasheet.ciiva.com/8021/1756152-8021598.pdf?src-supplier=Element14, ComponentLink11URL=https://datasheet.ciiva.com/8021/1756152-8021598.pdf?src-supplier=Element14, ComponentLink12Description=https://datasheet.ciiva.com/14122/anblm21p-data-e-14122214.pdf?src-supplier=Distrelec, ComponentLink12URL=https://datasheet.ciiva.com/14122/anblm21p-data-e-14122214.pdf?src-supplier=Distrelec, Construction="Chip Bead", Designed by="ismet Akalın", Filter Type="FERRITE CHIP", Height=0.85mm, JESD-609 Code=e3, Length=2mm, Manufacturer Part Number=BLM21PG221SN1D, Material=Ferrite, Min Frequency=100MHz, Mounting Technology="Surface Mount", Output Impedance=220R, Packaging="Tape and Reel", Pricing="10=0,0682, 100=0,0519, 500=0,0417, 1000=0,0367, 2000=0,0313, 4000=0,0258 (EUR)", Reach SVHC Compliant=Yes, RoHS=Yes, RoHS Compliant=Yes, Stock=72841, Supplier=Farnell, Terminal Finish=Nickel, Width=1.25mm
L1: "FIXED IND 100UH 1A 400 MOHM SMD", Case/Size Code=3232, DC Resistance (DCR)=400mR, Manufacturer=Bourns, Max Current Rating=1A, Max Operating Temperature=105°C, Min Operating Temperature=-40°C, Package Height=4mm, Package Length=8mm, Package Style=SMTMeter, Supplier Part Number=652-SRN8040-101M, Test Frequency=100kHz, Tolerance=20%, Inductance-Nom (L)=100uH, Inductor Application="POWER INDUCTOR", Inductor Type="GENERAL PURPOSE INDUCTOR", Category="Fixed Inductors", Channels=1, ComponentLink1Description=https://datasheet.ciiva.com:443/pdfs/VipMasterIC/IC/BOUR/BOUR-S-A0007011240/BOUR-S-A0007011240-1.pdf?src-supplier=IHS+Markit, ComponentLink1URL=https://datasheet.ciiva.com:443/pdfs/VipMasterIC/IC/BOUR/BOUR-S-A0007011240/BOUR-S-A0007011240-1.pdf?src-supplier=IHS+Markit, ComponentLink2Description=https://datasheet.ciiva.com/6689/srn8040-6689481.pdf?src-supplier=Digikey, ComponentLink2URL=https://datasheet.ciiva.com/6689/srn8040-6689481.pdf?src-supplier=Digikey, ComponentLink3Description=https://datasheet.ciiva.com/1049/srn8040-1049477.pdf?src-supplier=Digikey, ComponentLink3URL=https://datasheet.ciiva.com/1049/srn8040-1049477.pdf?src-supplier=Digikey, ComponentLink4Description=https://datasheet.ciiva.com/1049/srn8040-1049478.pdf?src-supplier=Digikey, ComponentLink4URL=https://datasheet.ciiva.com/1049/srn8040-1049478.pdf?src-supplier=Digikey, ComponentLink5Description=https://datasheet.ciiva.com/8515/srn8040-8515246.pdf?src-supplier=Avnet, ComponentLink5URL=https://datasheet.ciiva.com/8515/srn8040-8515246.pdf?src-supplier=Avnet, Construction=Shielded, Core Material=Ferrite, Designed by="ismet Akalın", JESD-609 Code=e1, Manufacturer Part Number=SRN8040-101M, Package Width=8mm, Packaging="Tape and Reel", Pins=2, Pricing="1=0,7, 10=0,513, 50=0,513, 100=0,439, 1000=0,272, 10000=0,253 (USD)", Reach SVHC Compliant=Yes, RoHS=Yes, RoHS Compliant=Yes, Shape/Size Description="RECTANGULAR PACKAGE", Shielding=Shielded, Stock=21385, Supplier=Mouser, Surface Mount=Yes, Terminal Finish=Copper, Terminal Placement="Dual Ended", Termination="One Surface"
R1: "RES 0.005 OHM 5W 4320 WIDE", Case/Package=4320, Manufacturer=Ohmite, Max Operating Temperature=155°C, Min Operating Temperature=-55°C, Package Height=0.5mm, Package Length=11mm, Package Width=5mm, Power=5W, Rated Temperature=70°C, Resistor Type="FIXED RESISTOR", Supplier Part Number=588-FCSL110R005FER, Temperature Coefficient (ppm/Cel)=50, Tolerance=1%, Category="Chip SMD Resistors", ComponentLink1Description=https://datasheet.ciiva.com:443/pdfs/VipMasterIC/IC/OMIT/OMIT-S-A0006531105/OMIT-S-A0006531105-1.pdf?src-supplier=IHS+Markit, ComponentLink1URL=https://datasheet.ciiva.com:443/pdfs/VipMasterIC/IC/OMIT/OMIT-S-A0006531105/OMIT-S-A0006531105-1.pdf?src-supplier=IHS+Markit, ComponentLink2Description=https://datasheet.ciiva.com/2484/res-fcsl-2484643.pdf?src-supplier=Digikey, ComponentLink2URL=https://datasheet.ciiva.com/2484/res-fcsl-2484643.pdf?src-supplier=Digikey, ComponentLink3Description=https://datasheet.ciiva.com/2484/res-fcsl-2484644.pdf?src-supplier=Digikey, ComponentLink3URL=https://datasheet.ciiva.com/2484/res-fcsl-2484644.pdf?src-supplier=Digikey, ComponentLink4Description=https://datasheet.ciiva.com/2484/res-fcsl-2484645.pdf?src-supplier=Digikey, ComponentLink4URL=https://datasheet.ciiva.com/2484/res-fcsl-2484645.pdf?src-supplier=Digikey, ComponentLink5Description=https://datasheet.ciiva.com/6181/fcsl-6181333.pdf?src-supplier=Farnell, ComponentLink5URL=https://datasheet.ciiva.com/6181/fcsl-6181333.pdf?src-supplier=Farnell, ComponentLink6Description=https://datasheet.ciiva.com/8080/fcsl-8080343.pdf?src-supplier=Element14, ComponentLink6URL=https://datasheet.ciiva.com/8080/fcsl-8080343.pdf?src-supplier=Element14, ComponentLink7Description=https://datasheet.ciiva.com/46422/1812595-46422917.pdf?src-supplier=Element14, ComponentLink7URL=https://datasheet.ciiva.com/46422/1812595-46422917.pdf?src-supplier=Element14, Construction=Rectangular, Designed by="ismet Akalın", Manufacturer Part Number=FCSL110R005FER, Mounting Technology="Surface Mount", Packaging="Tape and Reel", Pins=2, Pricing="1=2,58, 10=1,49, 50=1,35, 100=1,08, 1000=0,997, 10000=0,997 (USD)", Reach SVHC Compliant=Yes, RoHS=Yes, RoHS Compliant=Yes, Stock=2484, Supplier=Mouser, Technology="METAL FOIL", Termination=Wraparound
R2: "RES 10K OHM 1% 1/20W 0201", Case/Package=0201, Manufacturer=Yageo, Manufacturer Part Number=RC0201FR-07100KL, Max Operating Temperature=125°C, Min Operating Temperature=-55°C, Package Height=0.23mm, Package Length=0.6mm, Package Shape=Rectangular, Package Width=0.3mm, Power=50mW, Rated Temperature=70°C, Resistor Type="FIXED RESISTOR", Supplier Part Number=603-RC0201FR-07100KL, Temperature Coefficient (ppm/Cel)=200, Tolerance=1%, Working Voltage=25V, Additional Feature="LASER TRIMMABLE", Category="Chip SMD Resistors", ComponentLink1Description=https://datasheet.ciiva.com:443/pdfs/VipMasterIC/IC/YAGO/YAGO-S-A0008145938/YAGO-S-A0008145938-1.pdf?src-supplier=IHS+Markit, ComponentLink1URL=https://datasheet.ciiva.com:443/pdfs/VipMasterIC/IC/YAGO/YAGO-S-A0008145938/YAGO-S-A0008145938-1.pdf?src-supplier=IHS+Markit, ComponentLink2Description=https://datasheet.ciiva.com/2493/pyu-r-int-thick-7-2493769.pdf?src-supplier=Digikey, ComponentLink2URL=https://datasheet.ciiva.com/2493/pyu-r-int-thick-7-2493769.pdf?src-supplier=Digikey, ComponentLink3Description=https://datasheet.ciiva.com/2493/pyu-r-int-thick-7-2493770.pdf?src-supplier=Digikey, ComponentLink3URL=https://datasheet.ciiva.com/2493/pyu-r-int-thick-7-2493770.pdf?src-supplier=Digikey, ComponentLink4Description=https://datasheet.ciiva.com/2493/pyu-r-int-thick-7-2493771.pdf?src-supplier=Digikey, ComponentLink4URL=https://datasheet.ciiva.com/2493/pyu-r-int-thick-7-2493771.pdf?src-supplier=Digikey, ComponentLink5Description=https://datasheet.ciiva.com/7660/1421516-7660806.pdf?src-supplier=Element14, ComponentLink5URL=https://datasheet.ciiva.com/7660/1421516-7660806.pdf?src-supplier=Element14, ComponentLink6Description=https://datasheet.ciiva.com/22698/1563626-22698495.pdf?src-supplier=Element14, ComponentLink6URL=https://datasheet.ciiva.com/22698/1563626-22698495.pdf?src-supplier=Element14, ComponentLink7Description=https://datasheet.ciiva.com/46391/1421516-46391338.pdf?src-supplier=Element14, ComponentLink7URL=https://datasheet.ciiva.com/46391/1421516-46391338.pdf?src-supplier=Element14, ComponentLink8Description=https://datasheet.ciiva.com/26829/getdatasheetpartid-420441-26829850.pdf?src-supplier=Verical, ComponentLink8URL=https://datasheet.ciiva.com/26829/getdatasheetpartid-420441-26829850.pdf?src-supplier=Verical, Construction=Chip, Designed by="ismet Akalın", JESD-609 Code=e3, Mounting Technology="Surface Mount", Packaging="Tape and Reel", Pins=2, Pricing="1=0,1, 10=0,013, 50=0,013, 100=0,01, 1000=0,007, 10000=0,003 (USD)", Reach SVHC Compliant=Yes, RoHS=Yes, RoHS Compliant=Yes, Stock=559460, Supplier=Mouser, Technology="METAL GLAZE/THICK FILM", Terminal Finish=Nickel, Termination=Wraparound
R3 R7: "RES 6.8K OHM 1% 1/10W 0603", Case/Package=0603, Manufacturer=Yageo, Max Operating Temperature=155°C, Min Operating Temperature=-55°C, Package Height=0.45mm, Package Length=1.6mm, Package Shape=Rectangular, Package Width=0.8mm, Power=100mW, Rated Temperature=70°C, Resistor Type="FIXED RESISTOR", Supplier Part Number=603-RC0603FR-106K8L, Temperature Coefficient (ppm/Cel)=100, Tolerance=1%, Working Voltage=75V, Additional Feature="LASER TRIMMABLE", Category="Chip SMD Resistors", ComponentLink1Description=https://datasheet.ciiva.com:443/pdfs/VipMasterIC/IC/YAGO/YAGO-S-A0008145938/YAGO-S-A0008145938-1.pdf?src-supplier=IHS+Markit, ComponentLink1URL=https://datasheet.ciiva.com:443/pdfs/VipMasterIC/IC/YAGO/YAGO-S-A0008145938/YAGO-S-A0008145938-1.pdf?src-supplier=IHS+Markit, ComponentLink2Description=https://datasheet.ciiva.com/12561/rc0603-272842-12561433.pdf?src-supplier=Mouser, ComponentLink2URL=https://datasheet.ciiva.com/12561/rc0603-272842-12561433.pdf?src-supplier=Mouser, Construction=Chip, Designed by="ismet Akalın", JESD-609 Code=e3, Manufacturer Part Number=RC0603FR-106K8L, Mounting Technology="Surface Mount", Packaging="Tape and Reel", Pins=2, Pricing="1=0,1, 10=0,009, 50=0,009, 100=0,007, 1000=0,006, 10000=0,002 (USD)", Reach SVHC Compliant=Yes, RoHS=Yes, RoHS Compliant=Yes, Stock=27642, Supplier=Mouser, Technology="METAL GLAZE/THICK FILM", Terminal Finish=Nickel, Termination=Wraparound
R4: "RES SMD 330 OHM 1% 1/10W 0603", Case/Package=0603, Manufacturer="TE Connectivity", Manufacturer Series=CRG, Max Operating Temperature=125°C, Min Operating Temperature=-55°C, Package Shape=Rectangular, Power=100mW, Rated Temperature=70°C, Resistor Type="FIXED RESISTOR", Supplier Part Number=279-CRG0603F330R, Temperature Coefficient (ppm/Cel)=100, Tolerance=1%, Working Voltage=50V, Additional Feature="LASER TRIMMABLE", Category="Chip SMD Resistors", ComponentLink1Description=https://datasheet.ciiva.com:443/pdfs/VipMasterIC/IC/TYEC/TYECS00469/TYECS00469-1.pdf?src-supplier=IHS+Markit, ComponentLink1URL=https://datasheet.ciiva.com:443/pdfs/VipMasterIC/IC/TYEC/TYECS00469/TYECS00469-1.pdf?src-supplier=IHS+Markit, ComponentLink2Description=https://datasheet.ciiva.com/11812/0900766b800a696e-11812377.pdf?src-supplier=Rs, ComponentLink2URL=https://datasheet.ciiva.com/11812/0900766b800a696e-11812377.pdf?src-supplier=Rs, ComponentLink3Description=https://datasheet.ciiva.com/2529/eng-cd-1622918-ba-2529817.pdf?src-supplier=Digikey, ComponentLink3URL=https://datasheet.ciiva.com/2529/eng-cd-1622918-ba-2529817.pdf?src-supplier=Digikey, ComponentLink4Description=https://datasheet.ciiva.com/8904/eng-ds-1773204-f-8904639.pdf?src-supplier=Avnet, ComponentLink4URL=https://datasheet.ciiva.com/8904/eng-ds-1773204-f-8904639.pdf?src-supplier=Avnet, Designed by="ismet Akalın", JESD-609 Code=e3, Manufacturer Part Number=CRG0603F330R, Mounting Technology="Surface Mount", Packaging="Tape and Reel", Pins=2, Pricing="1=0,1, 10=0,023, 50=0,023, 100=0,012, 1000=0,006, 10000=0,004 (USD)", RoHS=Yes, RoHS Compliant=Yes, Stock=26411, Supplier=Mouser, Technology="METAL GLAZE/THICK FILM", Terminal Finish=Tin, Termination=Wraparound
R5: "RES SMD 330K OHM 1% 1/10W 0603", Case/Package=0603, Manufacturer=Panasonic, Max Operating Temperature=155°C, Min Operating Temperature=-55°C, Package Height=0.45mm, Package Length=1.6mm, Package Shape=Rectangular, Package Width=0.8mm, Power=100mW, Rated Temperature=70°C, Resistor Type="FIXED RESISTOR", Supplier Part Number=667-ERJ-3EKF3303V, Temperature Coefficient (ppm/Cel)=100, Tolerance=1%, Working Voltage=75V, Category="Chip SMD Resistors", ComponentLink1Description=https://datasheet.ciiva.com:443/pdfs/VipMasterIC/IC/PANA/PANA-S-A0009889626/PANA-S-A0009889626-1.pdf?src-supplier=IHS+Markit, ComponentLink1URL=https://datasheet.ciiva.com:443/pdfs/VipMasterIC/IC/PANA/PANA-S-A0009889626/PANA-S-A0009889626-1.pdf?src-supplier=IHS+Markit, ComponentLink2Description=https://datasheet.ciiva.com/7836/aoa0000ce2-7836502.pdf?src-supplier=Element14, ComponentLink2URL=https://datasheet.ciiva.com/7836/aoa0000ce2-7836502.pdf?src-supplier=Element14, ComponentLink3Description=https://datasheet.ciiva.com/22673/1678782-22673287.pdf?src-supplier=Element14, ComponentLink3URL=https://datasheet.ciiva.com/22673/1678782-22673287.pdf?src-supplier=Element14, ComponentLink4Description=https://datasheet.ciiva.com/22687/1678782-22687435.pdf?src-supplier=Element14, ComponentLink4URL=https://datasheet.ciiva.com/22687/1678782-22687435.pdf?src-supplier=Element14, ComponentLink5Description=https://datasheet.ciiva.com/24164/aoa0000ce2-24164038.pdf?src-supplier=Mouser, ComponentLink5URL=https://datasheet.ciiva.com/24164/aoa0000ce2-24164038.pdf?src-supplier=Mouser, ComponentLink6Description=https://datasheet.ciiva.com/16766/70260748-16766613.pdf?src-supplier=Allied+Electronics, ComponentLink6URL=https://datasheet.ciiva.com/16766/70260748-16766613.pdf?src-supplier=Allied+Electronics, ComponentLink7Description=https://datasheet.ciiva.com/16781/70260748-16781705.pdf?src-supplier=Allied+Electronics, ComponentLink7URL=https://datasheet.ciiva.com/16781/70260748-16781705.pdf?src-supplier=Allied+Electronics, ComponentLink8Description=https://datasheet.ciiva.com/9182/aoa0000ce2-9182954.pdf?src-supplier=Avnet, ComponentLink8URL=https://datasheet.ciiva.com/9182/aoa0000ce2-9182954.pdf?src-supplier=Avnet, ComponentLink9Description=https://datasheet.ciiva.com/9117/aoa0000ce2-9117145.pdf?src-supplier=Avnet, ComponentLink9URL=https://datasheet.ciiva.com/9117/aoa0000ce2-9117145.pdf?src-supplier=Avnet, ComponentLink10Description=https://datasheet.ciiva.com/30247/aoa0000ce2-30247322.pdf?src-supplier=Onlinecomponents.com, ComponentLink10URL=https://datasheet.ciiva.com/30247/aoa0000ce2-30247322.pdf?src-supplier=Onlinecomponents.com, Construction=Rectangular, Designed by="ismet Akalın", JESD-609 Code=e3, Manufacturer Part Number=ERJ-3EKF3303V, Mounting Technology="Surface Mount", Packaging="Tape and Reel", Pins=2, Pricing="1=0,1, 10=0,028, 50=0,028, 100=0,016, 1000=0,009, 10000=0,005 (USD)", Reach SVHC Compliant=Yes, Reference Standard=AEC-Q200, RoHS=Yes, RoHS Compliant=Yes, Stock=27005, Supplier=Mouser, Technology="METAL GLAZE/THICK FILM", Terminal Finish=Nickel, Termination=Wraparound
R6: "RES 1.2K OHM 1% 1/10W 0603", Case/Package=0603, Manufacturer=Yageo, Max Operating Temperature=155°C, Min Operating Temperature=-55°C, Package Height=0.45mm, Package Length=1.6mm, Package Shape=Rectangular, Package Width=0.8mm, Power=100mW, Rated Temperature=70°C, Resistor Type="FIXED RESISTOR", Supplier Part Number=603-RC0603FR-071K2L, Temperature Coefficient (ppm/Cel)=100, Tolerance=1%, Working Voltage=75V, Additional Feature="LASER TRIMMABLE", Category="Chip SMD Resistors", ComponentLink1Description=https://datasheet.ciiva.com:443/pdfs/VipMasterIC/IC/YAGO/YAGO-S-A0008145938/YAGO-S-A0008145938-1.pdf?src-supplier=IHS+Markit, ComponentLink1URL=https://datasheet.ciiva.com:443/pdfs/VipMasterIC/IC/YAGO/YAGO-S-A0008145938/YAGO-S-A0008145938-1.pdf?src-supplier=IHS+Markit, ComponentLink2Description=http://www.farnell.com/datasheets/2167052.pdf?src-supplier=Farnell, ComponentLink2URL=http://www.farnell.com/datasheets/2167052.pdf?src-supplier=Farnell, ComponentLink3Description=http://www.farnell.com/datasheets/1868787.pdf?src-supplier=Farnell, ComponentLink3URL=http://www.farnell.com/datasheets/1868787.pdf?src-supplier=Farnell, ComponentLink4Description=http://www.farnell.com/datasheets/443971.pdf?src-supplier=Farnell, ComponentLink4URL=http://www.farnell.com/datasheets/443971.pdf?src-supplier=Farnell, ComponentLink5Description=http://www.mouser.com/ds/2/447/RC0603-272842.pdf?src-supplier=Mouser, ComponentLink5URL=http://www.mouser.com/ds/2/447/RC0603-272842.pdf?src-supplier=Mouser, ComponentLink6Description=http://www.farnell.com/datasheets/2167052.pdf?src-supplier=Element14, ComponentLink6URL=http://www.farnell.com/datasheets/2167052.pdf?src-supplier=Element14, ComponentLink7Description=https://datasheet.octopart.com/RC0603FR-071K2L-Yageo-datasheet-164759695.pdf?src-supplier=Future+Electronics, ComponentLink7URL=https://datasheet.octopart.com/RC0603FR-071K2L-Yageo-datasheet-164759695.pdf?src-supplier=Future+Electronics, ComponentLink8Description=http://www.farnell.com/datasheets/2167052.pdf?src-supplier=Newark, ComponentLink8URL=http://www.farnell.com/datasheets/2167052.pdf?src-supplier=Newark, ComponentLink9Description=http://www.yageo.com/documents/recent/PYu-RC_Group_51_RoHS_L_9.pdf?src-supplier=Digikey, ComponentLink9URL=http://www.yageo.com/documents/recent/PYu-RC_Group_51_RoHS_L_9.pdf?src-supplier=Digikey, ComponentLink10Description=http://www.farnell.com/datasheets/1868787.pdf?src-supplier=Newark, ComponentLink10URL=http://www.farnell.com/datasheets/1868787.pdf?src-supplier=Newark, ComponentLink11Description=https://www.verical.com/server-webapp/html/getDatasheet?partID=326670&src-supplier=Verical, ComponentLink11URL=https://www.verical.com/server-webapp/html/getDatasheet?partID=326670&src-supplier=Verical, ComponentLink12Description=http://www.yageo.com/documents/recent/PYu-RC0603_51_RoHS_L_7.pdf?src-supplier=Future+Electronics, ComponentLink12URL=http://www.yageo.com/documents/recent/PYu-RC0603_51_RoHS_L_7.pdf?src-supplier=Future+Electronics, ComponentLink13Description=https://datasheet.octopart.com/RC0603FR-071K2L-Yageo-datasheet-62067350.pdf?src-supplier=Element14, ComponentLink13URL=https://datasheet.octopart.com/RC0603FR-071K2L-Yageo-datasheet-62067350.pdf?src-supplier=Element14, ComponentLink14Description=http://www.farnell.com/datasheets/1868787.pdf?src-supplier=Element14, ComponentLink14URL=http://www.farnell.com/datasheets/1868787.pdf?src-supplier=Element14, ComponentLink15Description=http://www.yageo.com/documents/recent/PYu-RC_Group_51_RoHS_L_10.pdf?src-supplier=Digikey, ComponentLink15URL=http://www.yageo.com/documents/recent/PYu-RC_Group_51_RoHS_L_10.pdf?src-supplier=Digikey, Construction=Chip, Designed by="ismet Akalın", JESD-609 Code=e3, Manufacturer Part Number=RC0603FR-071K2L, Mounting Technology="Surface Mount", Packaging="Tape and Reel", Pins=2, Pricing="1=0,1, 10=0,009, 50=0,009, 100=0,008, 1000=0,006, 10000=0,003 (USD)", Reach SVHC Compliant=Yes, RoHS=Yes, RoHS Compliant=Yes, Stock=2788, Supplier=Mouser, Technology="METAL GLAZE/THICK FILM", Terminal Finish=Nickel, Termination=Wraparound